# EAGLE board datasette_connector_panelized (EAGLE 7.7.0)
REVISION: v0.0.1
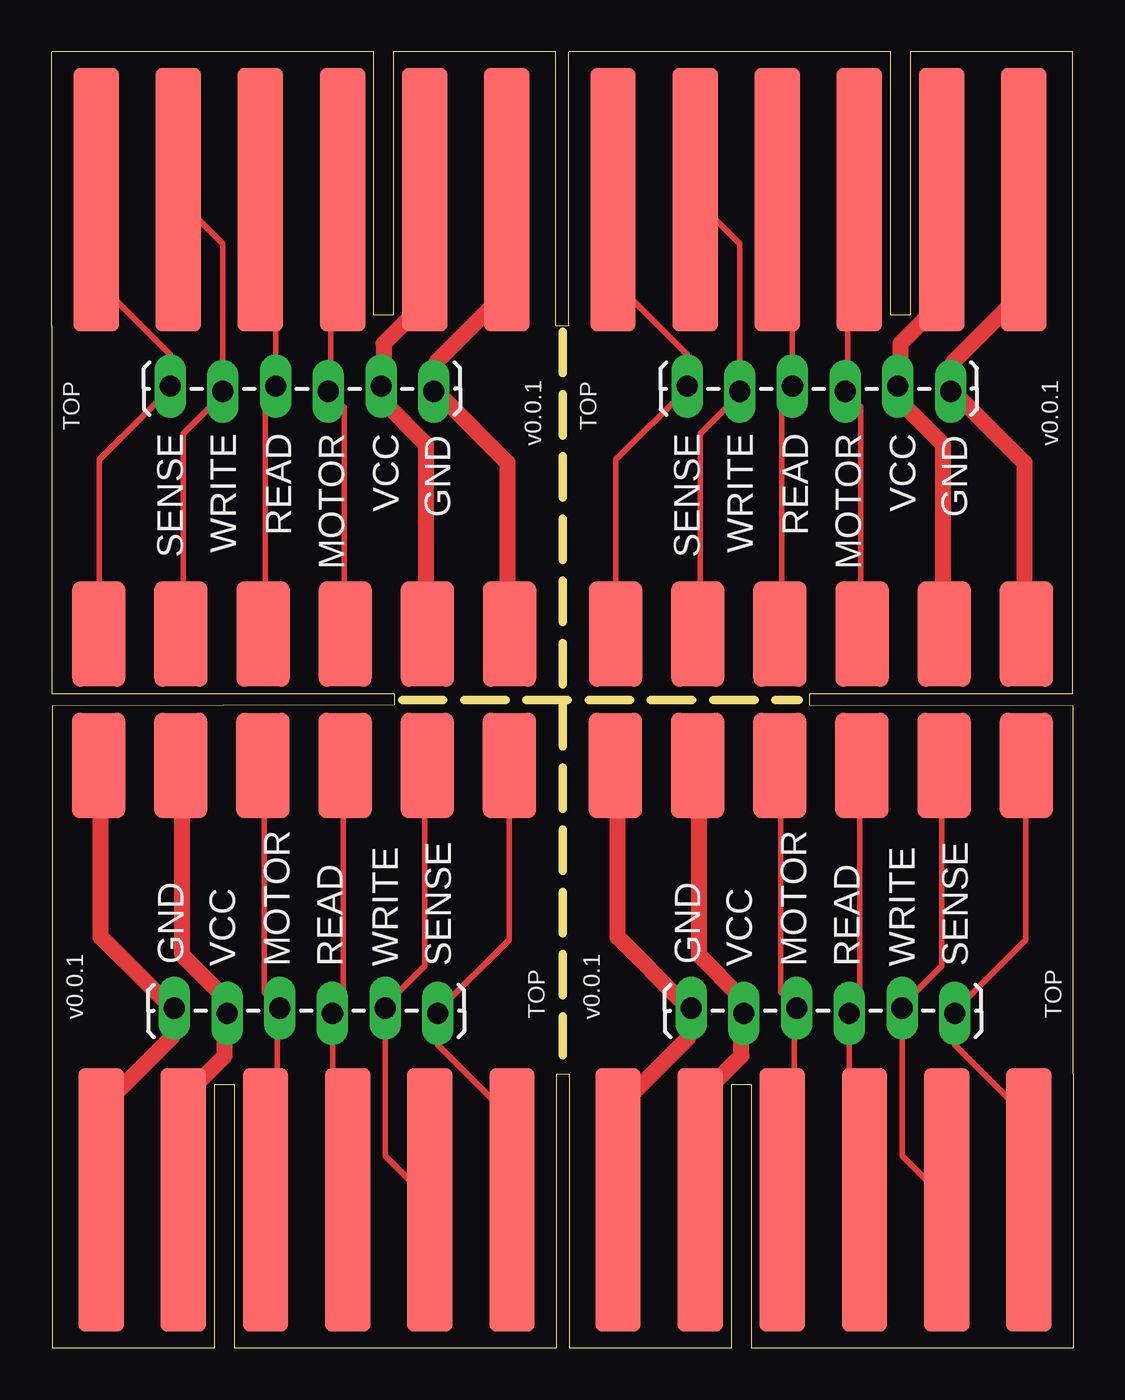
[diagram p0: board, top side]
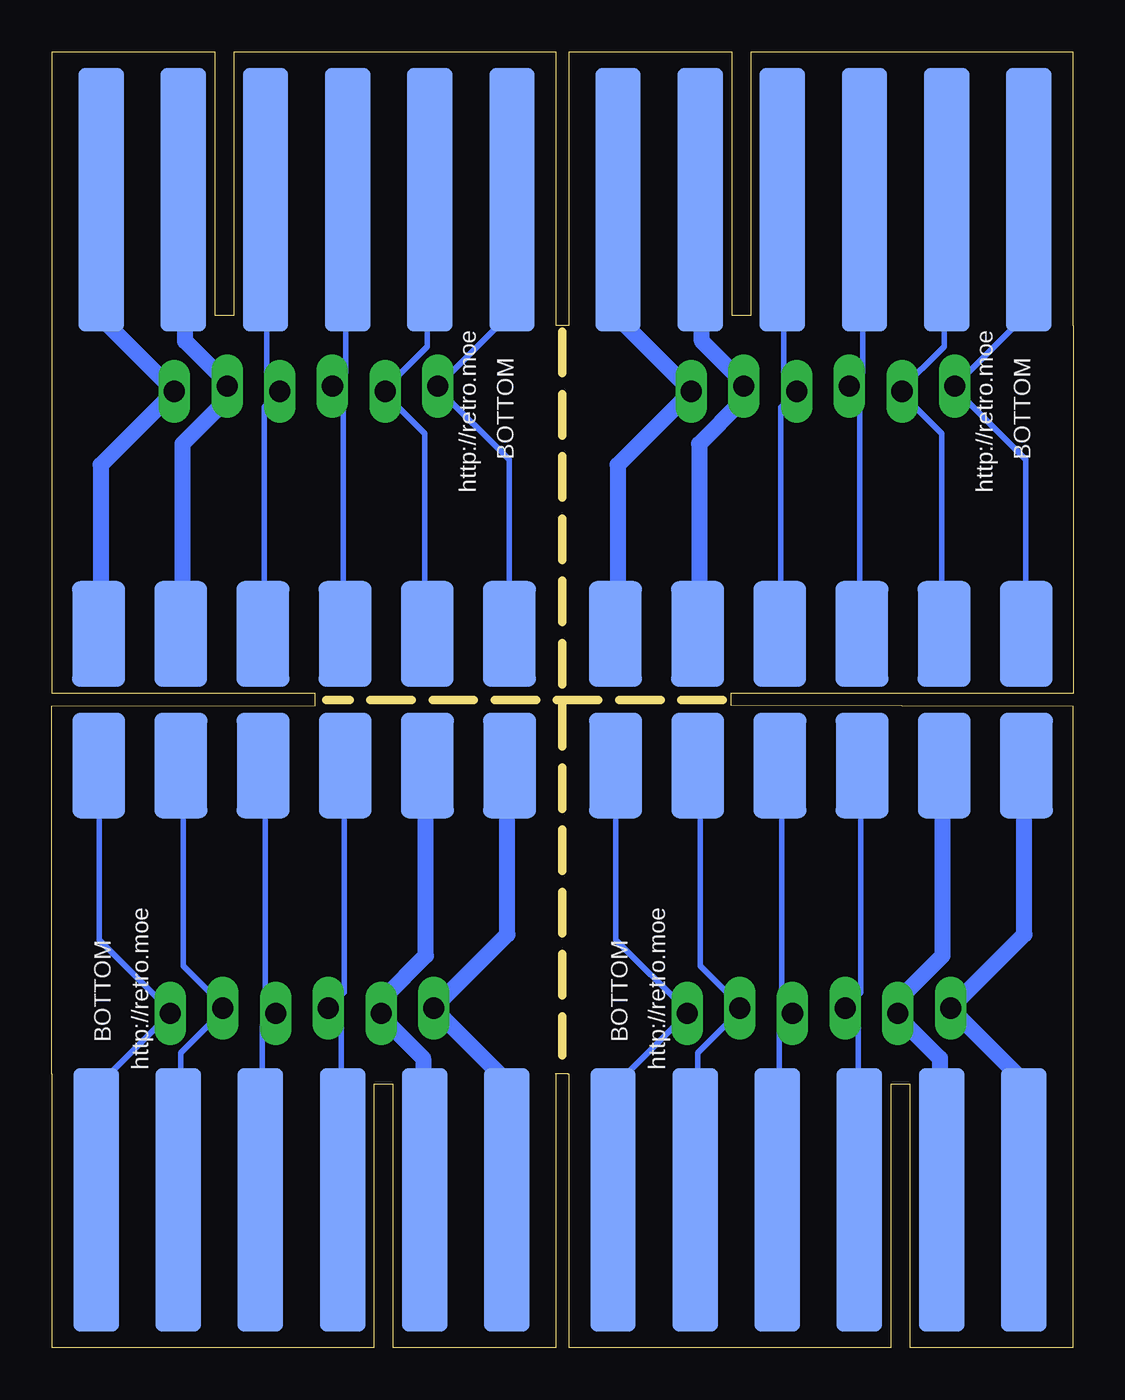
[diagram p1: board, bottom side, seen from below]

Size 49.22 x 62.47 mm. Coordinates in mm from the lower left corner, seen from the top.
Outline: 0,49.28 0,31.54 16.5,31.54
Outline: 36.53,31.54 49.2,31.54 49.2,49.28
Outline: 16.5,31.52 16.5,30.98 0.03,30.94 0.03,13.19
Outline: 49.22,13.19 49.22,30.94 36.52,30.96
Outline: 24.3,49.27 24.93,49.27
Outline: 24.33,13.19 24.34,13.2 24.97,13.2
Outline: 36.52,30.96 36.52,31.54
Copper layers (1*16): Top 0.035mm / dielectric 1.5mm / Bottom 0.035mm
Design rules "ITEADstudio_DRC": minimum track width 6mil, minimum drill 12mil, track to track 6mil, track to pad 6mil, pad to pad 6mil, via to via 6mil, smd to smd 0mil, copper to edge 10mil, drill to drill 10mil, minimum pad ring 10mil, minimum via ring 6mil, stop-mask expansion 2mil, vias tented up to drill 100mil, thermal gap 10mil
Net classes: 0 default: width 0.254 mm, clearance 0.254 mm; 1 GND: width 0.762 mm, clearance 0.381 mm; 2 VCC: width 0.762 mm, clearance 0.381 mm
Milling: 19 lines

## Footprints (pad centres in the part's own frame; a part is rotated, then mirrored left to right if it is on the bottom)
C64_CASSETTE = smd 2.2 x 12.7: 1 -21.779,-0.5; 2 -17.819,-0.5; 3 -13.859,-0.5; 4 -9.899,-0.5; 5 -5.939,-0.5; 6 -1.979,-0.5 | smd 2.2 x 12.7 bottom: A -21.779,-0.5; B -17.819,-0.5; C -13.859,-0.5; D -9.899,-0.5; E -5.939,-0.5; F -1.979,-0.5
C64_CASSETTE_CONN = smd 2.54 x 5.08: 1 -21.779,3.68; 2 -17.819,3.68; 3 -13.859,3.68; 4 -9.899,3.68; 5 -5.939,3.68; 6 -1.979,3.68 | smd 2.54 x 5.08 bottom: A -21.779,3.68; B -17.819,3.68; C -13.859,3.68; D -9.899,3.68; E -5.939,3.68; F -1.979,3.68
1X06_LOCK_LONGPADS = drill 1.016 long: 1 0,0; 2 2.54,-0.254; 3 5.08,0; 4 7.62,-0.254; 5 10.16,0; 6 12.7,-0.254

## Placement (x,y rotation side)
CN1  C64_CASETTE_EDGE  [C64_CASSETTE]  0.15,54.85 180 top
CN3  C64_CASETTE_CONN  [C64_CASSETTE_CONN]  0.28,30.73 0 bottom
CN11  C64_CASETTE_EDGE  [C64_CASSETTE]  25.07,54.85 180 top
CN12  C64_CASETTE_EDGE  [C64_CASSETTE]  24.16,7.62 0 top
CN13  C64_CASETTE_EDGE  [C64_CASSETTE]  49.06,7.62 0 top
CN31  C64_CASETTE_CONN  [C64_CASSETTE_CONN]  25.19,30.73 0 bottom
CN32  C64_CASETTE_CONN  [C64_CASSETTE_CONN]  24.03,31.74 180 bottom
CN33  C64_CASETTE_CONN  [C64_CASSETTE_CONN]  48.94,31.74 180 bottom
JP  C64 CON  [1X06_LOCK_LONGPADS]  18.41,46.11 180 top
JP1  C64 CON  [1X06_LOCK_LONGPADS]  43.31,46.11 180 top
JP2  C64 CON  [1X06_LOCK_LONGPADS]  5.91,16.37 0 top
JP3  C64 CON  [1X06_LOCK_LONGPADS]  30.82,16.37 0 top

## Library data of the parts
CN1 CN11-CN13 = commodore MOD
CN3 CN31-CN33 = commodore
JP JP1-JP3 = SparkFun

## Nets
GND [GND]: CN1.1 CN1.A CN3.1 CN3.A JP.1
GND1 [GND]: CN11.1 CN11.A CN31.1 CN31.A JP1.1
GND2 [GND]: CN12.1 CN12.A CN32.1 CN32.A JP2.1
GND3 [GND]: CN13.1 CN13.A CN33.1 CN33.A JP3.1
N$2: CN1.5 CN1.E CN3.5 CN3.E JP.5
N$13: CN1.6 CN1.F CN3.6 CN3.F JP.6
N$16: CN1.3 CN1.C CN3.3 CN3.C JP.3
N$21: CN11.5 CN11.E CN31.5 CN31.E JP1.5
N$22: CN12.5 CN12.E CN32.5 CN32.E JP2.5
N$23: CN13.5 CN13.E CN33.5 CN33.E JP3.5
N$38: CN1.4 CN1.D CN3.4 CN3.D JP.4
N$131: CN11.6 CN11.F CN31.6 CN31.F JP1.6
N$132: CN12.6 CN12.F CN32.6 CN32.F JP2.6
N$133: CN13.6 CN13.F CN33.6 CN33.F JP3.6
N$161: CN11.3 CN11.C CN31.3 CN31.C JP1.3
N$162: CN12.3 CN12.C CN32.3 CN32.C JP2.3
N$163: CN13.3 CN13.C CN33.3 CN33.C JP3.3
N$381: CN11.4 CN11.D CN31.4 CN31.D JP1.4
N$382: CN12.4 CN12.D CN32.4 CN32.D JP2.4
N$383: CN13.4 CN13.D CN33.4 CN33.D JP3.4
VCC [VCC]: CN1.2 CN1.B CN3.2 CN3.B JP.2
VCC1 [VCC]: CN11.2 CN11.B CN31.2 CN31.B JP1.2
VCC2 [VCC]: CN12.2 CN12.B CN32.2 CN32.B JP2.2
VCC3 [VCC]: CN13.2 CN13.B CN33.2 CN33.B JP3.2

## Tracks (layer width: path | path; a pad name or v marks a point on that pad's centre or on a via)
GND
  Top 0.762: CN1.A 21.83,55.25 21.83,50.81 18.53,47.51 18.53,46.11 JP.1 18.78,45.86 21.96,42.68 21.96,34.43 CN3.A
  Bottom 0.762: CN3.A 21.96,34.43 21.96,42.55 18.53,45.98 JP.1 18.66,46.36 21.83,49.54 21.83,55.25 CN1.A
GND1
  Top 0.762: CN11.A 46.74,55.25 46.74,50.81 43.44,47.51 43.44,46.11 JP1.1 43.69,45.86 46.87,42.68 46.87,34.43 CN31.A
  Bottom 0.762: CN31.A 46.87,34.43 46.87,42.55 43.44,45.98 JP1.1 43.56,46.36 46.74,49.54 46.74,55.25 CN11.A
GND2
  Top 0.762: CN12.A 2.48,7.22 2.48,11.67 5.78,14.97 5.78,16.36 JP2.1 5.53,16.62 2.35,19.79 2.35,28.05 CN32.A
  Bottom 0.762: CN32.A 2.35,28.05 2.35,19.92 5.78,16.49 JP2.1 5.66,16.11 2.48,12.94 2.48,7.22 CN12.A
GND3
  Top 0.762: CN13.A 27.39,7.22 27.39,11.67 30.69,14.97 30.69,16.36 JP3.1 30.44,16.62 27.26,19.79 27.26,28.05 CN33.A
  Bottom 0.762: CN33.A 27.26,28.05 27.26,19.92 30.69,16.49 JP3.1 30.57,16.11 27.39,12.94 27.39,7.22 CN13.A
N$2
  Top 0.254: CN1.E 6.21,55.25 8.24,53.22 JP.5 8.24,45.98 6.34,44.08 6.34,34.43 CN3.E
  Bottom 0.254: CN3.E 6.34,34.43 6.34,44.08 8.24,45.98 JP.5 8.37,46.11 6.21,48.27 6.21,55.25 CN1.E
N$13
  Top 0.254: CN1.F 2.15,55.25 2.15,51.44 5.7,47.89 JP.6 5.7,46.24 2.27,42.81 2.27,34.43 CN3.F
  Bottom 0.254: CN3.F 2.27,34.43 2.27,42.81 5.7,46.24 JP.6 2.15,49.92 2.15,55.25 CN1.F
N$16
  Top 0.254: CN1.C 13.96,55.25 13.45,54.75 13.45,46.11 JP.3 13.45,45.98 14.08,45.35 14.08,34.43 CN3.C
  Bottom 0.254: CN3.C 14.08,34.43 14.08,45.35 13.45,45.98 JP.3 13.45,46.11 13.96,46.62 13.96,55.25 CN1.C
N$21
  Top 0.254: CN11.E 31.12,55.25 33.15,53.22 JP1.5 33.15,45.98 31.25,44.08 31.25,34.43 CN31.E
  Bottom 0.254: CN31.E 31.25,34.43 31.25,44.08 33.15,45.98 JP1.5 33.28,46.11 31.12,48.27 31.12,55.25 CN11.E
N$22
  Top 0.254: CN12.E 18.1,7.22 16.07,9.25 JP2.5 16.07,16.49 17.97,18.4 17.97,28.05 CN32.E
  Bottom 0.254: CN32.E 17.97,28.05 17.97,18.4 16.07,16.49 JP2.5 15.94,16.36 18.1,14.21 18.1,7.22 CN12.E
N$23
  Top 0.254: CN13.E 43.01,7.22 40.98,9.25 JP3.5 40.98,16.49 42.88,18.4 42.88,28.05 CN33.E
  Bottom 0.254: CN33.E 42.88,28.05 42.88,18.4 40.98,16.49 JP3.5 40.85,16.36 43.01,14.21 43.01,7.22 CN13.E
N$38
  Top 0.254: CN1.D 10.15,55.25 10.78,54.62 JP.4 10.78,46.24 10.27,45.73 10.27,34.43 CN3.D
  Bottom 0.254: CN3.D 10.27,34.43 10.27,45.73 10.78,46.24 JP.4 10.15,47 10.15,55.25 CN1.D
N$131
  Top 0.254: CN11.F 27.05,55.25 27.05,51.44 30.61,47.89 JP1.6 30.61,46.24 27.18,42.81 27.18,34.43 CN31.F
  Bottom 0.254: CN31.F 27.18,34.43 27.18,42.81 30.61,46.24 JP1.6 27.05,49.92 27.05,55.25 CN11.F
N$132
  Top 0.254: CN12.F 22.16,7.22 22.16,11.03 18.61,14.59 JP2.6 18.61,16.24 22.04,19.67 22.04,28.05 CN32.F
  Bottom 0.254: CN32.F 22.04,28.05 22.04,19.67 18.61,16.24 JP2.6 22.16,12.56 22.16,7.22 CN12.F
N$133
  Top 0.254: CN13.F 47.08,7.22 47.08,11.03 43.52,14.59 JP3.6 43.52,16.24 46.95,19.67 46.95,28.05 CN33.F
  Bottom 0.254: CN33.F 46.95,28.05 46.95,19.67 43.52,16.24 JP3.6 47.08,12.56 47.08,7.22 CN13.F
N$161
  Top 0.254: CN11.C 38.87,55.25 38.36,54.75 38.36,46.11 JP1.3 38.36,45.98 38.99,45.35 38.99,34.43 CN31.C
  Bottom 0.254: CN31.C 38.99,34.43 38.99,45.35 38.36,45.98 JP1.3 38.36,46.11 38.87,46.62 38.87,55.25 CN11.C
N$162
  Top 0.254: CN12.C 10.35,7.22 10.86,7.73 10.86,16.36 JP2.3 10.86,16.49 10.23,17.13 10.23,28.05 CN32.C
  Bottom 0.254: CN32.C 10.23,28.05 10.23,17.13 10.86,16.49 JP2.3 10.86,16.36 10.35,15.86 10.35,7.22 CN12.C
N$163
  Top 0.254: CN13.C 35.26,7.22 35.77,7.73 35.77,16.36 JP3.3 35.77,16.49 35.14,17.13 35.14,28.05 CN33.C
  Bottom 0.254: CN33.C 35.14,28.05 35.14,17.13 35.77,16.49 JP3.3 35.77,16.36 35.26,15.86 35.26,7.22 CN13.C
N$381
  Top 0.254: CN11.D 35.06,55.25 35.69,54.62 JP1.4 35.69,46.24 35.18,45.73 35.18,34.43 CN31.D
  Bottom 0.254: CN31.D 35.18,34.43 35.18,45.73 35.69,46.24 JP1.4 35.06,47 35.06,55.25 CN11.D
N$382
  Top 0.254: CN12.D 14.16,7.22 13.53,7.86 JP2.4 13.53,16.24 14.04,16.75 14.04,28.05 CN32.D
  Bottom 0.254: CN32.D 14.04,28.05 14.04,16.75 13.53,16.24 JP2.4 14.16,15.48 14.16,7.22 CN12.D
N$383
  Top 0.254: CN13.D 39.07,7.22 38.44,7.86 JP3.4 38.44,16.24 38.95,16.75 38.95,28.05 CN33.D
  Bottom 0.254: CN33.D 38.95,28.05 38.95,16.75 38.44,16.24 JP3.4 39.07,15.48 39.07,7.22 CN13.D
VCC
  Top 0.762: CN1.B 17.89,55.25 17.89,50.3 15.99,48.4 15.99,46.36 JP.2 15.99,45.98 15.99,45.6 18.02,43.57 18.02,34.43 CN3.B
  Bottom 0.762: CN3.B 18.02,34.43 18.02,43.57 15.99,45.6 15.99,46.24 JP.2 15.99,46.62 17.89,48.52 17.89,55.25 CN1.B
VCC1
  Top 0.762: CN11.B 42.8,55.25 42.8,50.3 40.9,48.4 40.9,46.36 JP1.2 40.9,45.98 40.9,45.6 42.93,43.57 42.93,34.43 CN31.B
  Bottom 0.762: CN31.B 42.93,34.43 42.93,43.57 40.9,45.6 40.9,46.24 JP1.2 40.9,46.62 42.8,48.52 42.8,55.25 CN11.B
VCC2
  Top 0.762: CN12.B 6.42,7.22 6.42,12.17 8.32,14.08 8.32,16.11 JP2.2 8.32,16.49 8.32,16.87 6.29,18.9 6.29,28.05 CN32.B
  Bottom 0.762: CN32.B 6.29,28.05 6.29,18.9 8.32,16.87 8.32,16.24 JP2.2 8.32,15.86 6.42,13.95 6.42,7.22 CN12.B
VCC3
  Top 0.762: CN13.B 31.33,7.22 31.33,12.17 33.23,14.08 33.23,16.11 JP3.2 33.23,16.49 33.23,16.87 31.2,18.9 31.2,28.05 CN33.B
  Bottom 0.762: CN33.B 31.2,28.05 31.2,18.9 33.23,16.87 33.23,16.24 JP3.2 33.23,15.86 31.33,13.95 31.33,7.22 CN13.B

## Text on the board
tPlace: TOP | SENSE | WRITE | READ | MOTOR | VCC | GND | TOP | SENSE | WRITE | READ | MOTOR | VCC | GND | GND | GND | VCC | MOTOR | READ | WRITE | SENSE | TOP | VCC | MOTOR | READ | WRITE | SENSE | TOP
bPlace: BOTTOM | BOTTOM | http://retro.moe | http://retro.moe | http://retro.moe | http://retro.moe | BOTTOM | BOTTOM